# EAGLE board Stepper Driver (EAGLE 5.11)
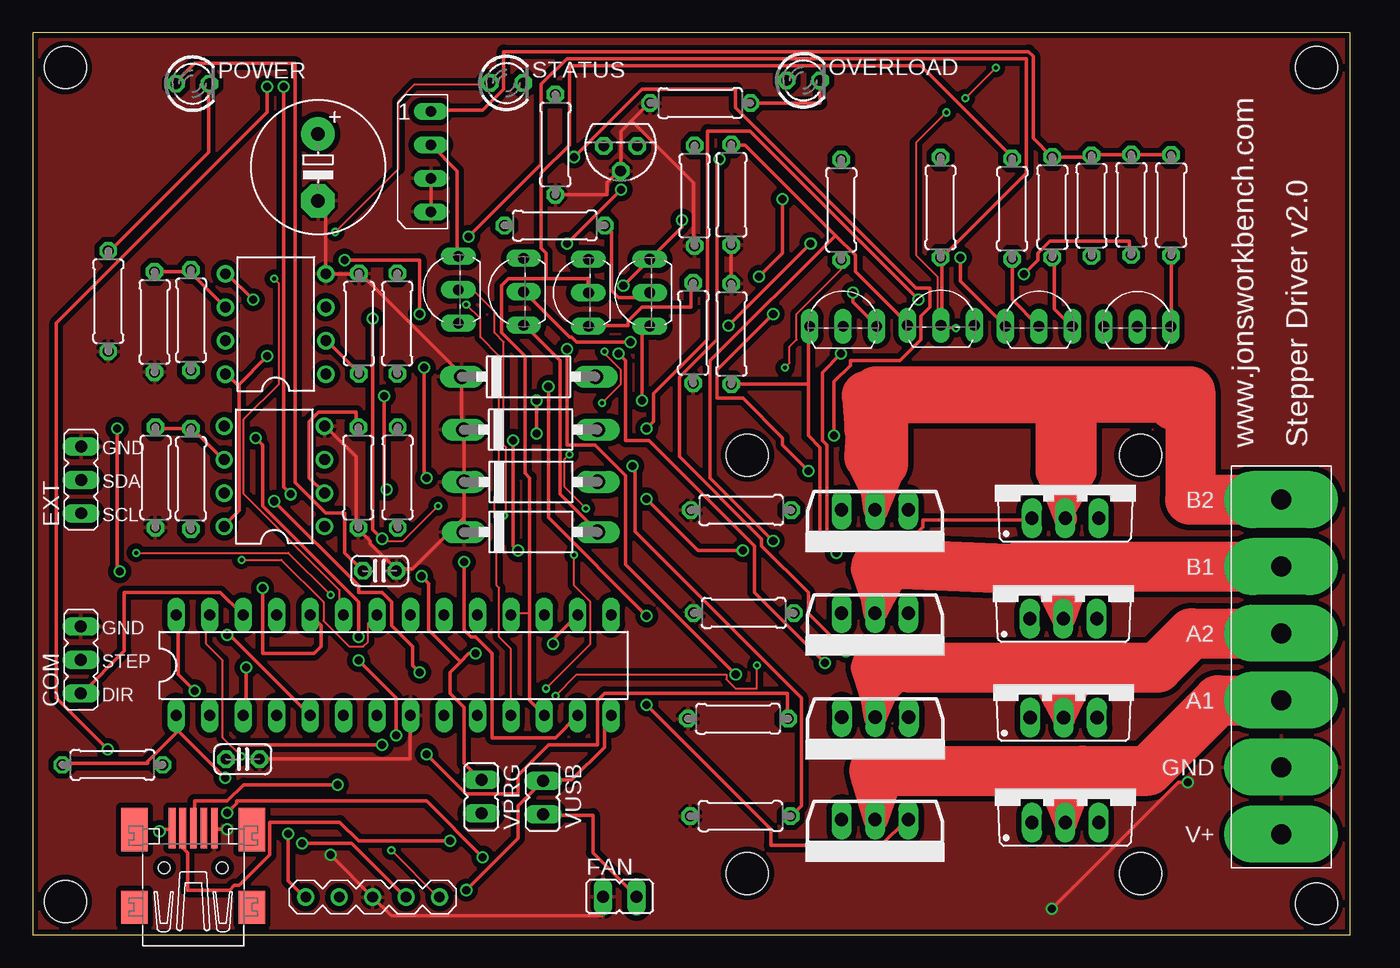
[diagram p0: board, top side]
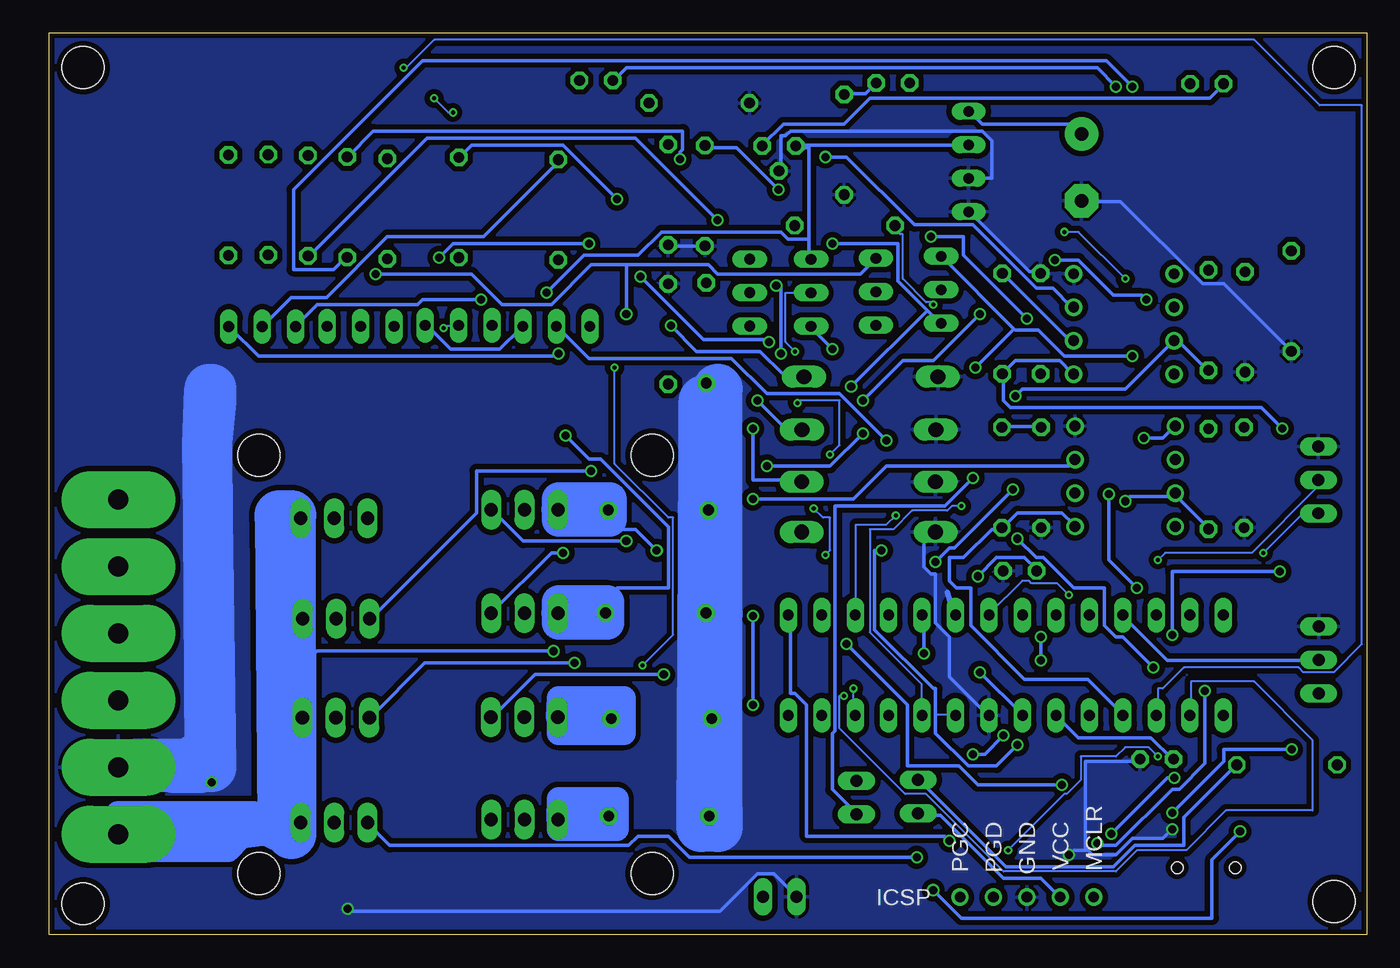
[diagram p1: board, bottom side, seen from below]

Size 100 x 68.44 mm. Coordinates in mm from the lower left corner, seen from the top.
Outline: 0,0 100,0 100,68.44 0,68.44 0,0
Copper layers (1*16): Top 0.035mm / dielectric 1.5mm / Bottom 0.035mm
Design rules "ITead_rule": minimum track width 6mil, minimum drill 12mil, track to track 6mil, track to pad 6mil, pad to pad 6mil, via to via 6mil, smd to smd 0mil, copper to edge 10mil, drill to drill 10mil, minimum pad ring 10mil, minimum via ring 6mil, stop-mask expansion 2mil, vias tented up to drill 100mil, thermal gap 10mil
Holes 3.2 mm at 84.07,4.65 84.07,36.4 54.23,4.65 54.23,36.4 97.41,2.34 2.46,2.51 2.46,65.81 97.41,65.81

## Footprints (pad centres in the part's own frame; a part is rotated, then mirrored left to right if it is on the bottom)
C025-024X044 = drill 0.813 octagon: 1 -1.27,0; 2 1.27,0
E5-10,5 = drill 1.016 pad 2.54 round: + -2.54,0 | drill 1.016 pad 2.54 octagon: - 2.54,0
COM = drill 0.9 pad 1.143 long: DIR -2.54,0; GND 2.54,0; STEP 0,0
P1-10 = drill 1.118 long: A 5.08,0; C -5.08,0
I2C = drill 0.9 pad 1.143 long: GND 2.54,0; SCL -2.54,0; SDA 0,0
JP1 = drill 0.914 long: 1 0,-1.27; 2 0,1.27
DIL08 = drill 0.813 pad 1.27 round: 1 -3.81,-3.81; 2 -1.27,-3.81; 3 1.27,-3.81; 4 3.81,-3.81; 5 3.81,3.81; 6 1.27,3.81; 7 -1.27,3.81; 8 -3.81,3.81
TO92 = drill 0.813 octagon: 1 -1.27,0; 2 0,1.905; 3 1.27,0
LED3MM = drill 0.813 octagon: A -1.27,0; K 1.27,0
TO262-V = drill 1.016 long: 1 -2.54,0; 2 0,0; 3 2.54,0
TO220BV = drill 1.016 long: D 0,-2.54; G -2.54,-2.54; S 2.54,-2.54
0207/7 = drill 0.813 octagon: 1 -3.81,0; 2 3.81,0
TO92-EBC = drill 0.813 long: B 0,-1.27; C 2.54,-1.27; E -2.54,-1.27
ICSP_HEADER = drill 0.8 round: 1 5.08,0; 2 2.54,0; 3 0,0; 4 -2.54,0; 5 -5.08,0
TO220-4 = drill 0.8 long: P$1 0,3.81; P$2 0,1.27; P$3 0,-1.27; P$4 0,-3.81
DIL28-3 = drill 0.813 long: 1 -16.51,-3.81; 2 -13.97,-3.81; 3 -11.43,-3.81; 4 -8.89,-3.81; 5 -6.35,-3.81; 6 -3.81,-3.81; 7 -1.27,-3.81; 8 1.27,-3.81; 9 3.81,-3.81; 10 6.35,-3.81; 11 8.89,-3.81; 12 11.43,-3.81; 13 13.97,-3.81; 14 16.51,-3.81; 15 16.51,3.81; 16 13.97,3.81; 17 11.43,3.81; 18 8.89,3.81; 19 6.35,3.81; 20 3.81,3.81; 21 1.27,3.81; 22 -1.27,3.81; 23 -3.81,3.81; 24 -6.35,3.81; 25 -8.89,3.81; 26 -11.43,3.81; 27 -13.97,3.81; 28 -16.51,3.81
6P_TERMINAL_BLOCK_5_08MM = drill 1.5 pad 4.318 long: P$1 -12.7,0; P$2 -7.62,0; P$3 -2.54,0; P$4 2.54,0; P$5 7.62,0; P$6 12.7,0
32005-301 = smd 3.1 x 0.5: 1 3,1.6; 2 3,0.8; 3 3,0; 4 3,-0.8; 5 3,-1.6 | smd 2.5 x 2: M1 -3,-4.45; M2 -3,4.45 | smd 3.3 x 2: M3 2.9,4.45; M4 2.9,-4.45 | hole 0.9: 0,2.2; 0,-2.2

## Placement (x,y rotation side)
C3  .1 uF  [C025-024X044]  26.31,27.61 180 top
C4  4.7 uF  [C025-024X044]  15.93,13.31 0 top
C6  100 uF  [E5-10,5]  21.64,58.24 270 top
COM  [COM]  3.63,20.85 90 top
D1  BA157  [P1-10]  37.8,30.56 0 top
D2  BA157  [P1-10]  37.8,34.37 0 top
D3  BA157  [P1-10]  37.77,38.33 0 top
D4  BA157  [P1-10]  37.62,42.34 0 top
EXT  [I2C]  3.66,34.52 90 top
FAN  [JP1]  44.53,2.87 270 top
IC1  LM2904N  [DIL08]  18.32,34.79 90 top
IC3  LM2904N  [DIL08]  18.42,46.35 90 top
IC4  LP2950Z  [TO92]  44.6,59.87 180 top
OVERLOAD  [LED3MM]  58.47,64.85 0 top
POWER  [LED3MM]  12.12,64.59 0 top
Q2  [TO262-V]  63.91,24.41 180 top
Q3  [TO262-V]  63.91,32.26 180 top
Q4  FQP27P06  [TO220BV]  78.36,34.14 0 top
Q5  [TO262-V]  63.91,8.74 180 top
Q6  FQP27P06  [TO220BV]  78.21,26.52 0 top
Q7  FQP27P06  [TO220BV]  78.36,11.05 0 top
Q8  [TO262-V]  63.93,16.51 180 top
Q9  FQP27P06  [TO220BV]  78.23,19.01 0 top
R1  10k  [0207/7]  53.01,56.16 90 top
R2  10k  [0207/7]  61.34,55.02 270 top
R3  10k  [0207/7]  86.39,55.37 270 top
R4  10k  [0207/7]  53.01,45.59 270 top
R5  10k  [0207/7]  68.88,55.19 270 top
R6  10k  [0207/7]  83.36,55.4 270 top
R7  10k  [0207/7]  50.11,45.67 90 top
R8  10k  [0207/7]  39.6,53.82 180 top
R9  10k  [0207/7]  80.34,55.33 270 top
R10  10k  [0207/7]  50.22,56.08 90 top
R11  10k  [0207/7]  74.32,55.09 90 top
R12  10k  [0207/7]  77.37,55.22 270 top
R13  .01  [0207/7]  53.95,24.41 180 top
R14  .01  [0207/7]  53.7,8.99 180 top
R15  10k 1%  [0207/7]  9.23,46.51 270 top
R16  270k 1%  [0207/7]  12,46.63 90 top
R17  10k 1%  [0207/7]  24.75,46.38 90 top
R18  270k 1%  [0207/7]  27.64,46.38 90 top
R19  68  [0207/7]  5.72,48.08 270 top
R20  68  [0207/7]  50.65,63.12 180 top
R21  68  [0207/7]  39.65,59.97 270 top
R22  10k  [0207/7]  6.04,12.88 0 top
R23  .01  [0207/7]  53.75,32.22 180 top
R24  10k 1%  [0207/7]  24.69,34.7 270 top
R25  270k 1%  [0207/7]  27.68,34.7 90 top
R26  .01  [0207/7]  53.52,16.38 180 top
R27  10k 1%  [0207/7]  9.3,34.7 270 top
R28  270k 1%  [0207/7]  11.99,34.59 90 top
STATUS  [LED3MM]  35.94,64.64 0 top
T1  [TO92-EBC]  68.91,47.52 0 top
T2  [TO92-EBC]  83.82,47.42 0 top
T3  [TO92-EBC]  61.49,47.45 0 top
T4  [TO92-EBC]  35.97,48.79 90 top
T5  [TO92-EBC]  40.89,48.72 90 top
T6  [TO92-EBC]  45.56,48.73 90 top
T7  [TO92-EBC]  31.01,48.95 90 top
T8  [TO92-EBC]  76.35,47.45 0 top
U$1  ICSP_HEADER  [ICSP_HEADER]  25.78,2.84 0 top
U$2  KA78R12CTU  [TO220-4]  30.2,58.67 0 top
U$3  PIC18F24J50  [DIL28-3]  27.38,20.45 0 top
U$5  6P_TERMINAL_BLOCK_5.08MM  [6P_TERMINAL_BLOCK_5_08MM]  94.74,20.32 90 top
VPRG  [JP1]  34.04,10.46 180 top
VUSB  [JP1]  38.71,10.41 180 top
X1  [32005-301]  12.17,5.08 90 top

## Library data of the parts
C3 C4 C6 = rcl
COM EXT FAN VPRG VUSB = jumper
D1-D4 = diode
IC1 IC3 IC4 = linear
OVERLOAD POWER STATUS = led
Q2-Q9 = transistor-power
R1-R28 = resistor
T1-T8 = transistor
U$1 U$2 U$5 = custom
U$3 = microchip
X1 = con-cypressindustries; OC_FARNELL: unknown; OC_NEWARK: unknown

## Nets
21: EXT.SCL U$3.21
+3V3: C3.2 IC4.1 POWER.A R22.2 U$3.19 VPRG.1
+12V: FAN.2 IC1.8 IC3.8 IC4.3 T1.C T3.C T5.C T7.C U$2.P$2 VUSB.2
GNDA: C3.1 C4.2 C6.- COM.GND D1.C D2.C D3.C D4.C EXT.GND FAN.1 IC1.4 IC3.4 IC4.2 R1.1 R4.1 R7.1 R10.1 R13.2 R14.2 R15.2 R17.2 R19.2 R20.2 R21.2 R23.2 R24.2 R26.2 R27.2 U$1.3 U$2.P$3 U$2.P$4 U$3.8 U$5.P$2 X1.5
N$1: U$1.1 U$3.27
N$2: C4.1 U$3.6
N$3: EXT.SDA U$3.22
N$4: IC3.7 R16.1 U$3.13
N$5: R22.1 U$1.5 U$3.1
N$7: U$1.2 U$3.28
N$8: IC3.1 R18.1 U$3.5
N$9: R5.2 U$3.10
N$10: T3.B U$3.9
N$11: IC1.3 Q3.3 R23.1
N$12: Q2.2 Q6.D U$5.P$5
N$13: Q3.2 Q4.D U$5.P$6
N$14: Q5.2 Q7.D U$5.P$3
N$15: Q8.2 Q9.D U$5.P$4
N$16: Q3.1 R1.2 T1.E
N$17: R2.1 T2.B
N$18: Q4.G R3.2 T2.C
N$19: Q2.1 R4.2 T3.E
N$20: R5.1 T4.B
N$21: Q6.G R6.2 T4.C
N$22: Q8.1 R7.2 T5.E
N$23: R8.1 T6.B
N$24: Q9.G R9.2 T6.C
N$25: Q5.1 R10.2 T7.E
N$26: R11.1 T8.B
N$27: Q7.G R12.2 T8.C
N$28: POWER.K R19.1
N$29: OVERLOAD.K R20.1
N$30: R21.1 STATUS.K
N$31: IC1.5 Q8.3 R26.1
N$32: IC1.2 R24.1 R25.2
N$33: IC1.1 R25.1 U$3.4
N$34: D4.A T8.E
N$35: IC1.6 R27.1 R28.2
N$36: IC3.3 Q2.3 R13.1
N$37: IC3.5 Q5.3 R14.1
N$38: IC3.6 R15.1 R16.2
N$39: U$1.4 VPRG.2
N$40: IC3.2 R17.1 R18.2
N$41: R2.2 U$3.2
N$42: IC1.7 R28.1 U$3.7
N$43: D3.A T6.E
N$44: D1.A T4.E
N$45: D2.A T2.E
N$46: U$3.14 VUSB.1 X1.1
N$47: U$3.15 X1.2
N$48: U$3.16 X1.3
N$50: OVERLOAD.A U$3.24
N$51: COM.DIR U$3.26
N$52: COM.STEP U$3.25
N$55: T7.B U$3.17
N$56: R11.2 U$3.18
N$58: STATUS.A U$3.23
N$60: T1.B U$3.3
N$62: T5.B U$3.12
N$63: R8.2 U$3.11
V+: C6.+ Q4.S Q6.S Q7.S Q9.S R3.1 R6.1 R9.1 R12.1 U$2.P$1 U$5.P$1

## Tracks (layer width: path | path; a pad name or v marks a point on that pad's centre or on a via)
21  (via drill 0.3)
  Top 0.152: v22.58,25.78 19.38,28.98 v7.82,28.98
  Bottom 0.152: v22.58,25.78 23.47,26.67 25.43,26.67 25.6,26.85 26.14,26.85 28.63,24.36 U$3.21 | v7.82,28.98 4.98,31.83 3.73,31.83 EXT.SCL
+3V3  (via drill 0.61)
  Top 0.254: v33.6,21.34 33.07,21.34 32.45,20.71 | 32.45,20.71 31.65,19.91 31.65,18.31 32.72,17.25 32.72,12.98 33.96,11.73 VPRG.1 | v29.52,27.2 30.05,26.67 30.05,23.11 32.45,20.71 | POWER.A 10.85,64.72 12.27,66.14 19.91,66.14 19.91,34.31 22.23,32 23.65,32 23.65,28.98 24.89,27.74 C3.2
  Bottom 0.254: POWER.A 10.85,64.54 11.91,63.48 37.69,63.48 39.65,61.52 44.27,61.52 45.87,59.92 IC4.1 | R22.2 9.96,12.8 13.87,8.89 13.87,6.76 17.6,6.76 19.2,5.16 27.38,5.16 33.96,11.73 VPRG.1 | v33.6,21.34 33.6,24.18 U$3.19 | v29.52,27.2 28.09,28.63 25.96,28.63 25.07,27.74 C3.2
+12V  (via drill 0.61)
  Top 0.254: VUSB.2 38.76,9.07 42.49,9.07 42.49,6.22 45.7,3.02 FAN.2 | 15.56,41.69 14.76,42.49 IC3.8 | 15.56,41.69 15.65,41.6 15.65,32.18 14.58,31.11 IC1.8 | U$2.P$2 32.18,57.96 32.18,51.56 T7.C | v62.23,48.72 62.23,48.01 64.01,46.23 T3.C | 15.56,41.69 v17.78,43.92 | v29.87,34.67 29.69,34.85 v29.69,43.03
  Bottom 0.254: T3.C 64.19,46.05 65.79,44.45 69.52,44.45 71.3,46.23 T1.C | 42.32,52.81 42.32,59.74 43.2,59.74 IC4.3 43.2,59.92 30.23,59.92 U$2.P$2 | 42.32,52.81 42.32,51.38 T5.C | v62.23,48.72 59.38,51.56 55.3,51.56 53.52,53.34 44.45,53.34 43.92,52.81 42.32,52.81 | v17.78,43.92 22.94,43.92 24.89,45.87 26.67,45.87 26.76,45.96 | 26.76,45.96 T7.C | v29.87,34.67 32,32.54 40.36,32.54 40.36,15.47 40.54,15.29 40.54,11.02 38.76,9.25 VUSB.2 | 26.76,45.96 v29.69,43.03
GNDA  (via drill 0.61)
  Top 0.254: FAN.1 43.2,2.85 43.2,1.42 27.2,1.42 U$1.3 v22.58,6.04 | v87.66,11.56 86.94,11.56 v77.34,1.96 | R4.1 52.98,49.43 52.98,52.27 R1.1 | R21.2 39.65,56.19 43.56,56.19 43.56,57.07 44.45,57.96 IC4.2 44.63,57.96 44.63,60.98 45.43,61.78 | 45.43,61.78 46.76,63.12 R20.2 | R10.1 50.14,52.27 50.14,57.07 45.43,61.78 | C4.2 17.25,13.34 28.63,13.34 28.63,16.54 U$3.8 | v14.76,8 13.87,8 X1.5 | IC1.4 22.23,38.58 24.54,36.27 24.54,30.94 R24.2 24.71,30.76 25.6,29.87 25.6,29.69 27.56,27.74 C3.1 27.74,27.74 28.8,27.74 32.72,31.65 | D1.C 32.72,31.65 | 32.72,31.65 D2.C 32.72,38.23 D3.C 32.54,38.41 D4.C 32.54,42.49 24.89,50.14 R17.2 24.71,50.14 22.4,50.14 IC3.4 22.23,50.32 22.23,55.12 C6.- | U$2.P$4 30.23,54.94 30.23,57.25 U$2.P$3
  Bottom 0.254: R7.1 50.14,41.96 49.25,41.43 | v77.34,1.96 77.17,1.78 49.07,1.78 46.23,4.62 44.98,4.62 43.38,3.02 FAN.1 | v87.66,11.56 87.66,12.7 | R13.2 50.14,24.36 49.25,24.36 | R19.2 5.87,44.45 10.85,49.43 12.45,49.43 18.67,55.65 21.51,55.65 C6.- | R10.1 52.98,52.27 R1.1 | v14.76,8 15.47,7.29 17.78,7.29 19.02,6.04 20.8,6.04 21.25,6.49 | 21.25,6.49 21.34,6.58 21.34,13.16 17.25,13.16 C4.2 | U$2.P$4 30.05,54.76 25.6,50.32 24.89,50.32 R17.2 | U$3.8 28.8,16.71 31.65,19.56 31.65,22.58 32.72,23.65 32.72,27.38 33.07,27.38 33.6,27.91 33.6,30.4 32.72,30.4 D1.C | IC4.2 44.45,57.96 44.45,60.63 44.09,60.63 43.74,60.98 29.16,60.98 28.45,60.27 28.45,57.43 30.05,57.43 U$2.P$3 | v22.58,6.04 22.23,6.4 21.34,6.4 21.25,6.49
  Bottom 0.406: 31.29,24.18 31.83,25.96
  Bottom 1.778: R26.2 49.25,8.91 49.25,9.42 49.89,9.42 R14.2 49.61,16.64 49.61,16.36 49.96,16.36 49.96,24.89 49.94,24.89 R23.2
  Bottom 3.81: U$5.P$2 87.66,12.7 88.01,37.16 | 88.01,37.16 87.66,40.54 87.66,41.43 | 50.32,40.54 50.32,36.45 50.49,8.18 49.25,8.18 49.25,9.42 49.25,24.36 49.25,41.43 | 88.01,37.16 87.83,41.43 | 88.01,37.16 87.83,13.51 88.54,13.51 88.54,12.62 90.5,12.62 90.5,12.8 94.06,12.8 94.06,12.62 93.34,12.62 93.34,12.98 88.9,12.98 88.9,13.34
  pour Bottom (isolate 0.406): 0.36,68.1 99.57,68.1 99.57,0.36 0.36,0.36
  pour Top (isolate 0.406): 0.53,67.92 99.57,67.92 99.57,0.36 0.53,0.36
N$1  (via drill 0.3)
  Top 0.152: v27.2,6.4 30.76,2.85 U$1.1 | v15.82,13.51 14.4,14.94 14.4,20.8 13.16,22.05 13.16,24 U$3.27
  Bottom 0.152: v27.2,6.4 22.94,10.67 22.76,10.67 21.69,11.73 21.69,13.51 19.02,13.51 18.31,14.22 16.54,14.22 v15.82,13.51
N$2
  Bottom 0.254: C4.1 14.76,13.34 16.36,14.94 21.87,14.94 U$3.6
N$3  (via drill 0.3)
  Top 0.152: v15.82,28.45 18.85,28.45 22.05,25.25 22.05,23.82 24,21.87 25.07,21.87 25.43,22.23 25.43,23.65 25.96,24.18 U$3.22
  Bottom 0.152: v15.82,28.45 15.29,28.98 8.71,28.98 3.73,33.96 3.73,34.49 EXT.SDA
N$4  (via drill 0.61)
  Top 0.254: v32.72,28.27 32.72,23.11 33.25,22.58 33.6,22.58 34.85,21.34 34.85,14.94 39.65,14.94 U$3.13 | v26.85,33.78 26.67,33.96 v26.67,40.89
  Bottom 0.254: R16.1 12.09,42.85 14.22,44.98 14.58,44.98 IC3.7 14.76,44.98 18.31,41.43 26.14,41.43 v26.67,40.89 | v32.72,28.27 31.65,29.34 31.29,29.34 v26.85,33.78
N$5  (via drill 0.61)
  Top 0.254: v19.38,7.64 19.38,4.09 20.62,2.85 U$1.5 | 11.02,15.47 v14.58,11.91 | 11.02,15.47 11.02,16.54 U$3.1 11.02,15.47 | 11.02,15.47 8.71,13.16 8.71,12.98 2.31,12.98 R22.1
  Bottom 0.254: v19.38,7.64 15.11,11.91 v14.58,11.91
N$7  (via drill 0.61)
  Top 0.254: v20.45,6.93 24.18,6.93 28.27,2.85 U$1.2 | v12.27,18.49 11.02,19.74 11.02,24.18 U$3.28
  Bottom 0.254: v20.45,6.93 20.27,6.76 19.02,6.76 14.76,11.02 14.22,11.02 12.27,12.98 v12.27,18.49
N$8  (via drill 0.61)
  Top 0.254: v14.76,22.76 14.94,22.76 20.98,16.71 U$3.5 | v6.58,27.56 6.4,27.74 v6.4,38.41
  Bottom 0.254: v14.76,22.76 14.76,27.56 v6.58,27.56 | v6.4,38.41 8,40.01 27.03,40.01 27.56,40.54 27.56,42.49 R18.1 27.56,42.67 26.67,43.56 23.29,43.56 22.4,42.67 IC3.1
N$9  (via drill 0.3, 0.61)
  Top 0.152: v30.76,32.54 28.09,29.87 26.49,29.87 v26.49,30.05
  Top 0.254: 16,16.71 16.18,16.89 v16.18,20.27 | v26.49,30.05 25.78,30.76 v25.78,46.76 | v33.07,52.98 38.58,58.5 38.58,64.54 40.54,66.5 75.39,66.5 75.39,57.78 68.99,51.38 | 68.99,51.38 68.99,46.41 | 68.99,51.38 R5.2
  Bottom 0.152: v30.76,32.54 31.47,32.54 31.83,32.18 34.49,32.18 35.92,30.76 37.69,30.76 37.69,22.94 33.78,19.02 33.78,16.71 U$3.10
  Bottom 0.254: v16.18,20.27 18.49,22.58 19.02,22.58 19.91,23.47 19.91,26.31 22.23,26.31 24.54,28.63 25.07,28.63 v26.49,30.05 | v25.78,46.76 30.58,51.56 30.58,52.98 v33.07,52.98
N$10  (via drill 0.61)
  Top 0.254: 15.65,14.4 v26.49,14.4 | v36.8,29.16 36.45,29.52 v36.45,37.52 | T3.B 61.34,46.23
  Bottom 0.152: 32.72,16.71 31.29,16.71 U$3.9
  Bottom 0.254: v26.49,14.4 28.09,12.8 30.23,12.8 32.72,15.29 32.72,16.71 32.72,18.67 32.89,18.67 37.34,23.11 37.34,29.16 v36.8,29.16 | v36.45,37.52 40.01,41.07 45.52,41.07 48.18,43.74 59.03,43.74 61.34,46.05 T3.B
N$11  (via drill 0.61)
  Top 0.254: v46.58,33.07 50.49,29.16 v53.87,29.16
  Bottom 0.254: v46.58,33.07 38.94,33.07 36.45,35.56 22.58,35.56 22.23,35.92 IC1.3 | v53.87,29.16 55.47,30.76 56.36,30.76 57.43,31.47
  Bottom 2.54: 61.34,32.26 Q3.3 | 61.34,32.26 61.34,32.72 57.61,32.72 | 61.34,32.26 61.34,31.83 57.56,31.83 R23.1 57.61,32.22 57.61,31.47 61.34,31.47 61.34,33.07 57.43,33.07 57.43,31.47
N$12
  Top 1.778: Q2.2 63.3,28.09 62.94,27.74 63.65,25.78 64.01,24.54 65.96,28.12 | Q6.D 75.92,28.63 78.23,24 79.65,27.94
  Top 3.81: U$5.P$5 79.65,27.94 76.28,27.94 76.28,27.91 74.85,27.94 74.85,27.74 65.96,28.12 64.01,27.94 64.01,27.91
N$13
  Top 1.778: Q3.2 63.48,35.38 62.59,35.92 63.83,33.43 65.25,35.2 64.01,32.18 64.01,35.74 | Q4.D 76.99,35.03 79.83,35.03 78.23,32.18 76.99,35.2 76.99,39.12 79.83,35.2 79.83,38.76 78.77,38.58 78.23,35.92 78.41,40.72
  Top 3.81: U$5.P$6 87.83,33.02 87.83,40.18 | 87.83,40.18 87.83,41.25 64.01,41.25 64.01,35.74 64.54,35.74 64.54,40.89 | 64.54,40.89 64.19,40.89 | 64.19,40.89 63.3,40.89 63.48,38.41 63.65,38.41 63.48,36.27 64.19,36.27 64.19,40.89 | 64.54,40.89 66.5,40.89 66.5,41.07 65.96,41.07 65.96,40.72 78.41,40.72 86.59,40.72 86.59,40.18 87.83,40.18
N$14
  Top 1.778: Q5.2 62.94,11.91 63.83,9.42 65.25,11.73 65.08,11.73 | 65.08,11.73 64.54,11.73 64.54,12.62 68.99,12.62 68.99,12.98 67.56,12.98 67.56,11.73 63.83,12.45 | 65.08,11.73 64.01,8.71 | Q7.D 77.34,11.02 78.41,8.53 79.65,11.73 79.65,12.45
  Top 3.81: U$5.P$3 89.97,17.78 84.63,12.45 79.65,12.45 63.83,12.45
N$15
  Top 1.778: Q8.2 63.48,19.38 63.65,18.14 62.94,20.27 63.83,17.96 64.01,16.71 65.25,19.56 64.54,18.14 66.5,20.27 | Q9.D 75.92,20.8 78.23,16.54 80.37,20.98 78.23,20.27
  Top 3.81: U$5.P$4 87.94,22.86 85.34,20.27 78.23,20.27 66.5,20.27 64.01,20.27
N$16  (via drill 0.61)
  Top 0.254: 60.9,53.07 54.05,59.92 53.16,59.92 R1.2 | 60.9,53.07 62.41,51.56 62.41,50.32 66.32,46.41 T1.E | v56.19,29.87 51.38,34.67 51.38,43.56 60.9,53.07
  Bottom 0.254: v56.19,29.87 64.01,29.87 66.32,32.18 Q3.1
N$17
  Bottom 0.254: R2.1 61.34,58.67 67.03,52.98 74.32,52.98 78.94,48.36 81.61,48.36 T2.B
N$18  (via drill 0.61)
  Top 0.254: T2.C 86.41,46.23 86.41,51.56 R3.2 | v61.34,44.09 59.92,42.67 59.92,37.52 60.27,37.16 60.27,30.4 67.03,30.4 67.56,30.94 67.56,31.47 75.74,31.47 Q4.G
  Bottom 0.254: v61.34,44.09 61.52,43.92 84.1,43.92 86.23,46.05 T2.C
N$19  (via drill 0.61)
  Top 0.254: 58.85,41.78 58.85,46.05 T3.E | 58.85,41.78 R4.2 | v60.98,28.98 59.74,30.23 59.74,36.98 58.85,37.87 58.85,41.78
  Bottom 0.254: v60.98,28.98 61.87,28.98 Q2.1
N$20  (via drill 0.61)
  Top 0.254: v45.34,44.98 41.25,44.98 40.89,45.34 40.72,45.34 37.34,48.72 T4.B | v55.12,49.96 56.9,51.74 v56.9,55.83
  Bottom 0.254: v45.34,44.98 45.52,45.16 50.32,45.16 v55.12,49.96 | v56.9,55.83 60.98,59.92 67.92,59.92 68.81,59.03 R5.1
N$21  (via drill 0.61)
  Top 0.254: v75.21,50.14 76.28,51.21 76.28,51.74 77.17,52.63 83.21,52.63 83.21,51.74 R6.2 | v58.85,35.2 56.9,37.16 56.9,37.69 53.87,40.72 51.92,40.72 51.92,42.85 v56.19,47.12
  Bottom 0.254: 56.19,50.85 58.85,50.85 61.87,47.83 65.61,47.83 67.92,50.14 v75.21,50.14 | 56.19,50.85 49.96,50.85 49.25,50.14 38.41,50.14 37.34,51.21 T4.C | v58.85,35.2 67.56,35.2 67.56,32 75.56,24 Q6.G | 56.19,50.85 v56.19,47.12
N$22  (via drill 0.61)
  Top 0.254: T5.E 42.32,46.23 45.16,46.23 45.16,46.58 46.23,47.65 49.96,47.65 49.96,49.43 R7.2 | v53.34,19.74 44.98,28.09 44.98,34.85 42.67,37.16 40.54,37.16 v40.54,44.45
  Bottom 0.254: v53.34,19.74 63.12,19.74 66.32,16.54 Q8.1 | v40.54,44.45 42.14,46.05 T5.E
N$23
  Top 0.254: R8.1 43.56,53.7 43.92,53.34 43.92,48.9 44.45,48.36 46.76,48.36 46.76,48.72 T6.B
N$24  (via drill 0.61)
  Top 0.254: v49.25,54.23 49.25,53.7 46.94,51.38 T6.C 46.76,51.21 v44.81,49.25 | v60.1,20.62 54.76,25.96 54.76,29.52 46.76,37.52 44.98,37.52 44.98,43.56 v44.45,44.09
  Bottom 0.254: v49.25,54.23 55.47,60.45 71.3,60.45 80.19,51.56 R9.2 | v60.1,20.62 71.48,20.62 75.56,16.54 Q9.G | v44.45,44.09 44.45,49.25 v44.81,49.25
N$25  (via drill 0.61)
  Top 0.254: v40.54,52.45 v44.63,56.54 | v46.58,17.42 56.01,8 56.01,6.76 64.36,6.76 66.32,8.71 Q5.1 | v46.58,24.18 39.12,31.65 v39.12,41.6
  Bottom 0.254: 33.34,47.38 35.56,49.61 35.56,52.45 v40.54,52.45 | 33.34,47.38 32.36,46.41 T7.E | v44.63,56.54 47.83,59.74 50.14,59.74 R10.2 | v46.58,17.42 v46.58,24.18 | v39.12,41.6 33.34,47.38
N$26
  Top 0.254: T8.B 76.28,46.23 74.32,48.18 R11.1
N$27  (via drill 0.61)
  Top 0.254: T8.C 78.77,46.23 77.52,47.47 77.52,51.38 R12.2 | v34.14,5.87 29.87,10.13 15.47,10.13 15.47,9.96 v14.76,9.25 | v5.69,14.05 1.78,17.96 1.78,46.41 17.78,62.41 v17.78,64.36
  Bottom 0.254: v34.14,5.87 51.38,5.87 52.98,7.47 55.3,7.47 56.01,6.76 74.14,6.76 75.74,8.36 Q7.G | v14.76,9.25 10.85,13.16 10.85,14.05 v5.69,14.05 | v17.78,64.36 19.74,66.32 71.65,66.32 81.43,56.54 81.43,50.49 78.41,50.49 77.52,51.38 R12.2
N$28
  Top 0.254: R19.1 5.87,51.92 13.34,59.38 13.34,64.54 POWER.K
N$29
  Top 0.254: R20.1 59.74,63.12 OVERLOAD.K
N$30
  Bottom 0.254: STATUS.K 37.34,64.54 38.05,63.83 39.65,63.83 R21.1
N$31  (via drill 0.61)
  Top 0.254: v16.89,37.69 17.42,37.16 17.42,32.54 24.71,25.25 v24.71,22.58 | v24.71,20.8 27.56,17.96 v27.56,15.11 | v29.87,13.69 32.89,10.67 36.8,10.67 36.8,12.09 39.12,14.4 42.85,14.4 42.85,17.78 43.38,18.31 57.25,18.31 57.25,16.54 R26.1
  Bottom 0.254: v16.89,37.69 15.47,37.69 14.58,38.58 IC1.5 | v24.71,20.8 v24.71,22.58 | v27.56,15.11 28.98,13.69 v29.87,13.69
  Bottom 1.778: Q8.3 61.34,17.96 56.36,17.96 56.36,15.29 61.34,15.29 61.34,17.6 59.92,16.54 R26.1
N$32
  Top 0.254: IC1.2 22.05,33.6 20.98,34.67 20.98,38.94 21.69,39.65 24.54,39.65 24.54,38.58 R24.1
  Bottom 0.254: R25.2 27.56,38.58 24.71,38.58 R24.1
N$33
  Bottom 0.254: U$3.4 18.49,16.71 21.16,19.38 25.96,19.38 30.05,23.47 30.05,26.31 31.11,26.31 31.65,26.85 31.65,28.63 30.58,28.63 28.45,30.76 27.74,30.76 R25.1 27.56,30.94 26.49,32 23.11,32 22.23,31.11 IC1.1
N$34  (via drill 0.61)
  Top 0.254: v70.41,51.38 70.41,49.61 73.79,46.23 T8.E | v52.81,46.23 v59.03,52.45
  Bottom 0.254: v70.41,51.38 69.34,52.45 v59.03,52.45 | v52.81,46.23 50.85,44.27 46.05,44.27 44.27,42.49 42.85,42.49 D4.A
N$35
  Top 0.254: R27.1 9.42,38.41 R28.2 12.09,38.41 14.4,36.09 IC1.6
N$36  (via drill 0.61)
  Top 0.254: v41.07,59.03 46.23,64.19 53.34,64.19 53.34,62.76 67.03,49.07 68.1,49.07 68.1,47.65 67.39,46.94 67.39,45.16 65.79,43.56 62.05,43.56 62.05,43.2 60.81,41.96 v60.81,37.87
  Bottom 0.254: v41.07,59.03 39.47,59.03 34.31,53.87 29.87,53.87 25.07,49.07 23.82,49.07 22.4,47.65 IC3.3 | v60.81,37.87 59.03,36.09 58.14,36.09 52.98,30.94 52.98,26.31 56.9,26.31 57.61,25.25
  Bottom 2.54: 61.34,24.41 Q2.3 | 61.34,24.41 61.34,24.89 57.96,24.89 | 61.34,24.41 61.34,24 57.76,24 R13.1 57.78,24.41 57.78,23.65 61.34,23.65 61.34,25.25 57.61,25.25 57.61,23.65
N$37  (via drill 0.61)
  Top 0.254: v16.71,48.18 14.76,50.14 IC3.5 | v23.65,51.21 29.34,51.21 v29.34,47.12 | v38.23,40.54 v38.23,38.05 | v45.52,35.56 45.7,35.38 45.7,30.58 58.32,17.96 58.32,9.78 57.61,9.07 R14.1
  Bottom 0.254: v16.71,48.18 17.07,48.54 19.2,48.54 21.87,51.21 v23.65,51.21 | v29.34,47.12 32.89,43.56 35.2,43.56 v38.23,40.54 | v38.23,38.05 40.72,35.56 v45.52,35.56
  Bottom 1.778: Q5.3 61.34,10.31 56.9,10.31 56.9,8 61.34,8 61.34,9.78 R14.1
N$38
  Top 0.254: R15.1 9.25,50.32 11.91,50.32 R16.2 12.09,50.32 12.09,50.14 14.58,47.65 IC3.6
N$39
  Bottom 0.254: U$1.4 23.29,2.85 24.71,4.27 27.56,4.27 32.36,9.07 33.96,9.07 VPRG.2
N$40
  Top 0.254: R17.1 24.71,42.67 22.4,44.98 IC3.2
  Bottom 0.254: R18.2 27.56,50.14 22.58,45.16 22.4,45.16 IC3.2
N$41  (via drill 0.3)
  Top 0.152: v39.65,18.14 41.25,19.74 52.63,19.74 52.63,19.38 53.34,18.67 54.94,18.67 v54.94,20.45 | v57.07,43.03 57.43,43.38 57.43,44.63 57.96,45.16 57.96,47.12 61.34,50.49 R2.2
  Bottom 0.152: v39.65,18.14 40.01,18.14 40.01,15.65 35.03,10.67 33.43,10.67 27.56,4.8 19.02,4.8 17.42,6.4 13.69,6.4 10.67,9.42 4.09,9.42 4.09,14.76 8.53,19.2 13.34,19.2 13.34,16.71 U$3.2 | v54.94,20.45 52.63,22.76 52.63,31.65 52.98,31.65 57.07,35.74 v57.07,43.03
N$42  (via drill 0.61)
  Top 0.254: v29.34,19.91 28.8,20.45 28.8,21.87 27.2,23.47 27.2,25.25 26.49,25.96 24.71,25.96 24.71,26.49 v18.31,32.89
  Bottom 0.152: U$3.7 26.14,16.71
  Bottom 0.254: R28.1 12.09,30.94 14.58,33.43 IC1.7 14.58,33.25 17.96,33.25 v18.31,32.89 | 26.14,16.71 v29.34,19.91
N$43  (via drill 0.61)
  Top 0.254: v46.23,40.54 46.23,45.52 46.76,46.05 T6.E
  Bottom 0.254: v46.23,40.54 44.09,38.41 42.85,38.41 D3.A
N$44
  Top 0.254: T4.E 37.34,46.23 40.01,43.56 40.01,33.43 D1.A
N$45  (via drill 0.61)
  Top 0.254: v67.21,48.18 54.41,60.98 51.21,60.98 51.21,45.16 47.12,41.07 47.12,38.94 v46.58,38.41
  Bottom 0.254: v67.21,48.18 71.65,48.18 72.01,47.83 79.65,47.83 81.25,46.23 T2.E | v46.58,38.41 46.58,34.49 43.03,34.49 D2.A
N$46  (via drill 0.61)
  Top 0.254: U$3.14 43.74,16.54 43.38,16.18 43.38,14.22 40.89,11.73 38.76,11.73 VUSB.1 36.8,9.78 36.8,7.29 v32.89,3.38 | v9.6,7.82 9.6,8 10.49,8 X1.1
  Bottom 0.254: v9.6,7.82 11.73,5.69 11.73,1.25 30.76,1.25 v32.89,3.38
N$47  (via drill 0.61)
  Top 0.254: v31.65,7.11 24.71,7.11 23.29,8.53 17.96,8.53 17.96,6.04 15.65,3.73 15.29,3.73 14.94,3.38 11.73,3.38 11.73,6.22 11.38,6.58 11.38,8 X1.2
  Bottom 0.254: v31.65,7.11 32,7.47 42.49,7.47 42.49,17.42 43.38,18.31 43.74,18.31 43.74,24.18 U$3.15
N$48  (via drill 0.61)
  Top 0.254: v39.47,22.05 39.47,22.4 41.25,24.18 U$3.16 | v23.11,11.38 16,11.38 14.76,10.13 12.27,10.13 12.27,8.18 X1.3
  Bottom 0.254: v39.47,22.05 34.85,17.42 34.85,12.8 30.94,12.8 29.52,11.38 v23.11,11.38
N$50  (via drill 0.61)
  Top 0.254: v17.42,26.31 17.42,21.34 21.34,21.34 21.87,21.87 21.87,23.47 21.16,24.18 U$3.24 | v19.56,33.43 19.02,33.96 v19.02,64.36
  Bottom 0.254: v17.42,26.31 19.56,28.45 v19.56,33.43 | v19.02,64.36 20.45,65.79 56.19,65.79 57.07,64.9 OVERLOAD.A
N$51
  Top 0.254: U$3.26 15.82,24.36 14.22,25.96 6.93,25.96 6.93,21.51 3.73,18.31 COM.DIR
N$52
  Bottom 0.254: U$3.25 18.49,24.18 15.11,20.8 3.73,20.8 COM.STEP
N$55  (via drill 0.3)
  Top 0.152: v35.74,31.83 35.92,32 35.92,36.98 35.74,37.16 35.74,44.98 35.03,45.7 35.03,47.3 33.43,48.9 32.36,48.9 T7.B
  Bottom 0.152: v35.74,31.83 36.45,31.11 38.76,31.11 38.76,24.36 U$3.17
N$56
  Top 0.152: 37.69,24.36 36.27,24.36 U$3.18
  Top 0.254: 38.76,16.71 37.69,17.78 37.69,24.36 37.69,34.67 37.34,35.03 37.34,43.92 35.56,45.7 35.56,49.25 36.09,49.78 38.94,49.78 | 38.94,49.78 42.14,49.78 42.14,48.72 | 38.94,49.78 38.94,51.74 38.58,52.09 38.58,57.78 40.72,59.92 40.72,65.96 67.39,65.96 74.32,59.03 R11.2
N$58  (via drill 0.3)
  Top 0.152: v18.31,49.78 18.67,49.43 18.67,41.78 16,39.12 16,33.43 23.29,26.14 23.29,24.54 U$3.23 | v22.94,53.34 27.74,58.14 27.74,63.3 28.98,64.54 34.67,64.54 STATUS.A
  Bottom 0.152: v18.31,49.78 21.87,53.34 v22.94,53.34
N$60  (via drill 0.3)
  Top 0.152: v73.08,65.79 v70.76,63.48 | v69.34,62.41 67.03,60.1 67.03,51.56 68.63,49.96 68.63,46.23 68.81,46.05 v70.05,46.05
  Bottom 0.152: v73.08,65.79 72.9,65.79 70.76,67.92 8.53,67.92 3.56,62.94 0.36,62.94 0.36,22.05 2.49,19.91 4.8,19.91 5.16,20.27 13.87,20.27 15.47,18.67 15.82,18.67 15.82,16.71 U$3.3 | v70.76,63.48 69.7,62.41 v69.34,62.41 | v70.05,46.05 69.88,46.23 68.99,46.23 T1.B
N$62  (via drill 0.3)
  Top 0.152: v38.94,18.67 42.32,22.05 42.32,25.25 41.07,26.49 v41.07,28.8 | v41.96,32.36 40.36,33.96 40.36,36.09 v40.72,36.45 | v43.2,40.36 44.63,41.78 44.63,42.85 43.38,44.09 v43.38,44.27
  Bottom 0.152: v38.94,18.67 38.94,16.71 U$3.12 | v41.07,28.8 40.72,29.16 40.72,31.65 41.25,31.65 v41.96,32.36 | v40.72,36.45 40.01,37.16 40.01,40.54 43.03,40.54 v43.2,40.36 | v43.38,44.27 44.09,44.98 44.09,48.72 T5.B
N$63  (via drill 0.3)
  Top 0.152: v32.89,47.83 33.96,46.76 33.96,45.34 35.38,43.92 35.38,33.6 35.03,33.25 35.03,31.65 35.38,31.29 35.38,29.87 35.2,29.69 35.2,26.49 35.38,26.31 35.38,22.58 36.27,21.69 U$3.11
  Bottom 0.152: v32.89,47.83 33.07,48.01 33.43,48.01 35.2,49.78 35.2,53.16 35.38,53.16 35.92,53.7 R8.2
V+  (via drill 0.61)
  Top 0.254: R3.1 86.23,59.21 R6.1 80.37,59.21 R9.1 80.19,59.03 R12.1 77.34,59.03 75.92,60.45 75.92,66.67 75.56,67.03 35.74,67.03 35.74,64.19 34.14,62.59 30.23,62.59 U$2.P$1 | v61.7,21.51 58.85,24.36 58.85,25.96 55.3,29.52 55.3,30.05 49.07,36.27 49.07,42.32 51.92,45.16 51.92,58.67 v52.09,58.85
  Bottom 0.254: Q4.S 80.9,31.65 82.5,31.65 | 82.32,8.36 81.08,7.64 Q7.S | Q9.S 80.72,16.54 80.9,15.82 | U$2.P$1 30.05,62.41 29.16,61.52 22.4,61.52 21.69,60.81 C6.+ | v61.7,21.51 79.65,21.51 79.83,21.34 81.61,21.34 | v52.09,58.85 52.09,59.38 51.92,59.56 51.92,60.98 75.39,60.98 77.34,59.03 R12.1
  Bottom 1.778: Q9.S 80.59,12.83 | Q7.S 80.9,15.82 81.41,15.82 | 81.61,20.65 81.61,20.8 80.75,20.8 Q6.S | Q4.S 80.9,28.3 | U$5.P$1 94.74,9.22 94.77,9.25 84.45,9.25 84.1,8.89 92.1,8.89 94.59,6.4 86.41,6.4 85.52,7.29 | 85.52,7.29 84.99,8 | 86.23,7.29 85.52,7.29 | 86.23,7.29 90.5,7.29 91.21,8 | 82.32,8.36 82.86,8.36 82.86,7.29 83.57,7.64 86.23,7.29
  Bottom 3.81: 81.61,7.62 81.61,20.8 81.61,21.34 81.61,31.83 82.5,31.83 82.5,31.65 82.32,8.36 | 91.21,8 91.21,8.18

## Text on the board
tPlace: www.jonsworkbench.com | Stepper Driver v2.0